# EAGLE board WS2812D (EAGLE 9.6.2)

Size 16.51 x 33.02 mm. Coordinates in mm from the lower left corner, seen from the top.
Outline: 0,33.02 16.51,33.02 16.51,0 0,0 0,33.02
Copper layers (1*16): Top 0.035mm / dielectric 1.5mm / Bottom 0.035mm
Design rules "default": minimum track width 6mil, minimum drill 0.35mm, track to track 6mil, track to pad 6mil, pad to pad 6mil, via to via 6mil, smd to smd 6mil, copper to edge 40mil, drill to drill 6mil, minimum pad ring 10mil, minimum via ring 8mil, stop-mask expansion 4mil, vias tented up to drill 0mil, thermal gap 10mil

## Footprints (pad centres in the part's own frame; a part is rotated, then mirrored left to right if it is on the bottom)
C050-025X075 = drill 0.813 octagon: 1 -2.54,0; 2 2.54,0
1X03 = drill 1.016 long: 1 -2.54,0; 2 0,0; 3 2.54,0
0204/7 = drill 0.8 pad 1.676 octagon: 1 -3.81,0; 2 3.81,0
MA04-1 = drill 1.016 long: 1 -3.81,0; 2 -1.27,0; 3 1.27,0; 4 3.81,0

## Placement (x,y rotation side)
C1  100nf  [C050-025X075]  6.35,12.7 0 top
IN  [1X03]  6.35,3.81 0 top
OUT  [1X03]  6.35,29.21 0 top
R1  75  [0204/7]  12.7,11.43 270 top
WS2812D  [MA04-1]  7.62,20.32 180 top

## Library data of the parts
C1 R1 = Clean-Kong
IN OUT = pinhead
WS2812D = con-lstb

## Nets
S$1: C1.1 IN.1 OUT.1 WS2812D.3
S$2: C1.2 IN.2 OUT.2 WS2812D.2
S$3: OUT.3 WS2812D.1
S$4: IN.3 R1.2
S$5: R1.1 WS2812D.4

## Tracks (layer width: path | path; a pad name or v marks a point on that pad's centre or on a via)
S$1  (3 unrouted)
S$2  (3 unrouted)
S$3  (1 unrouted)
S$4  (1 unrouted)
S$5  (1 unrouted)

## Text on the board
tNames: GND | VCC | DOUT | (c) G0PJO | GND | VCC | DIN